# Allegro board visualscope1.0.brd
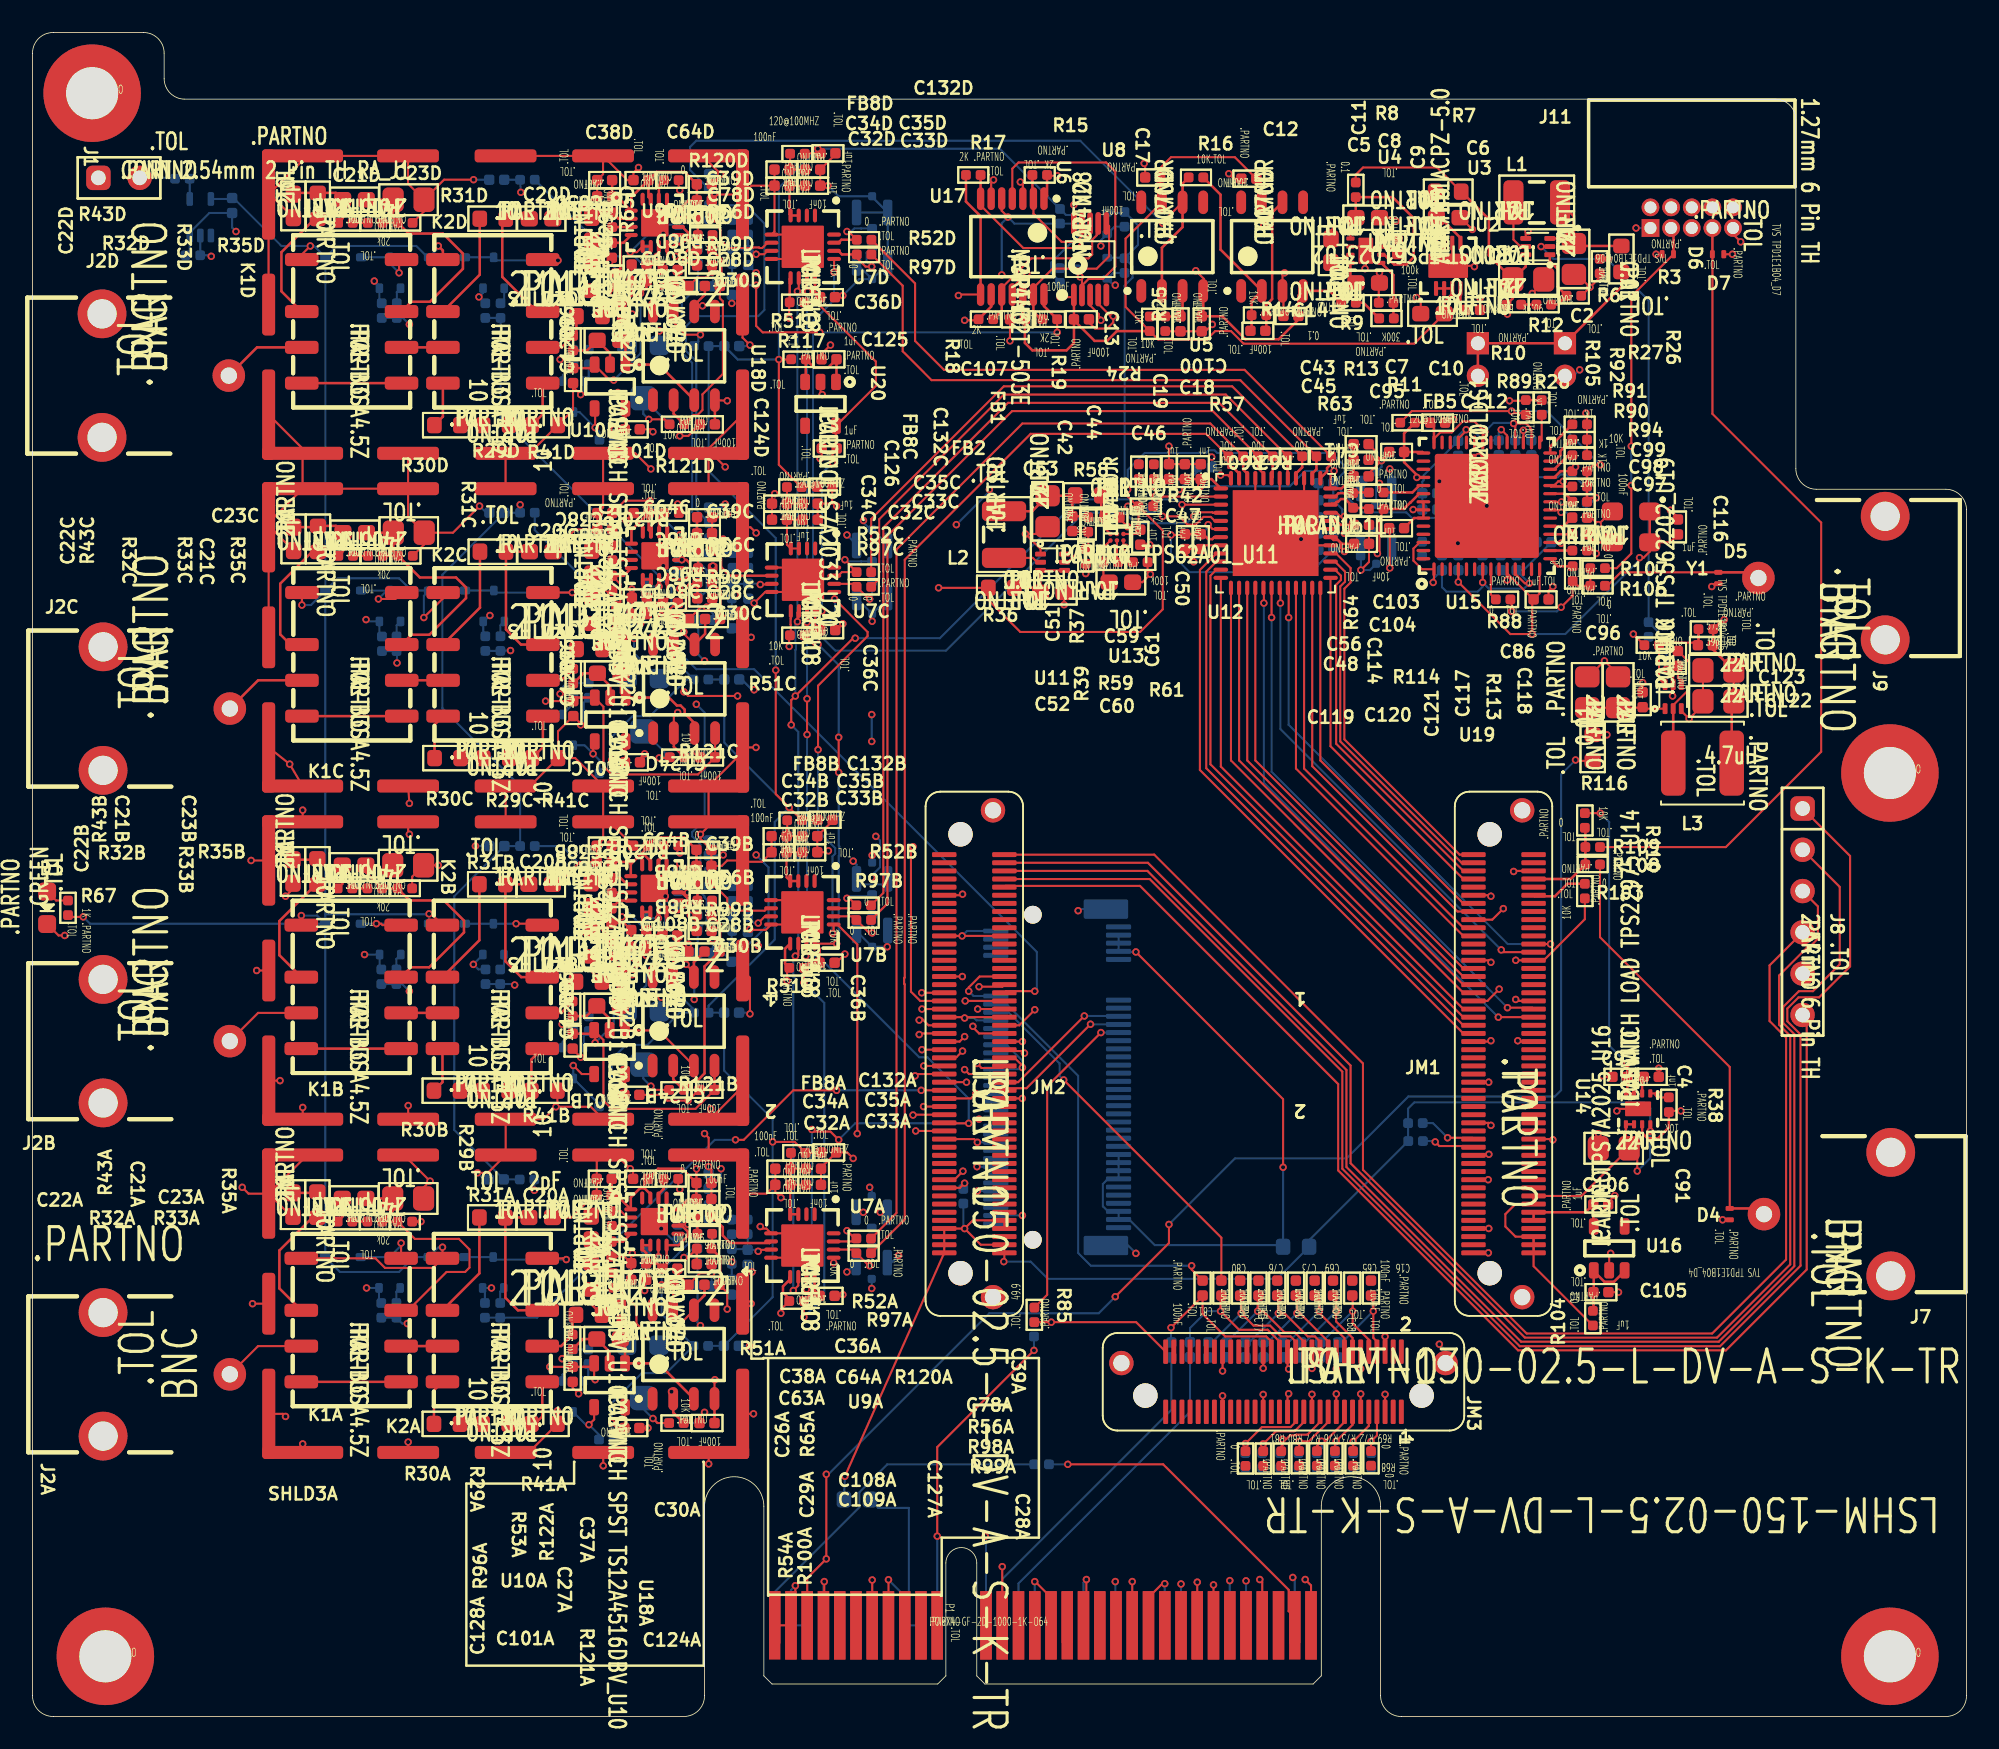
[diagram p0: board, top side]
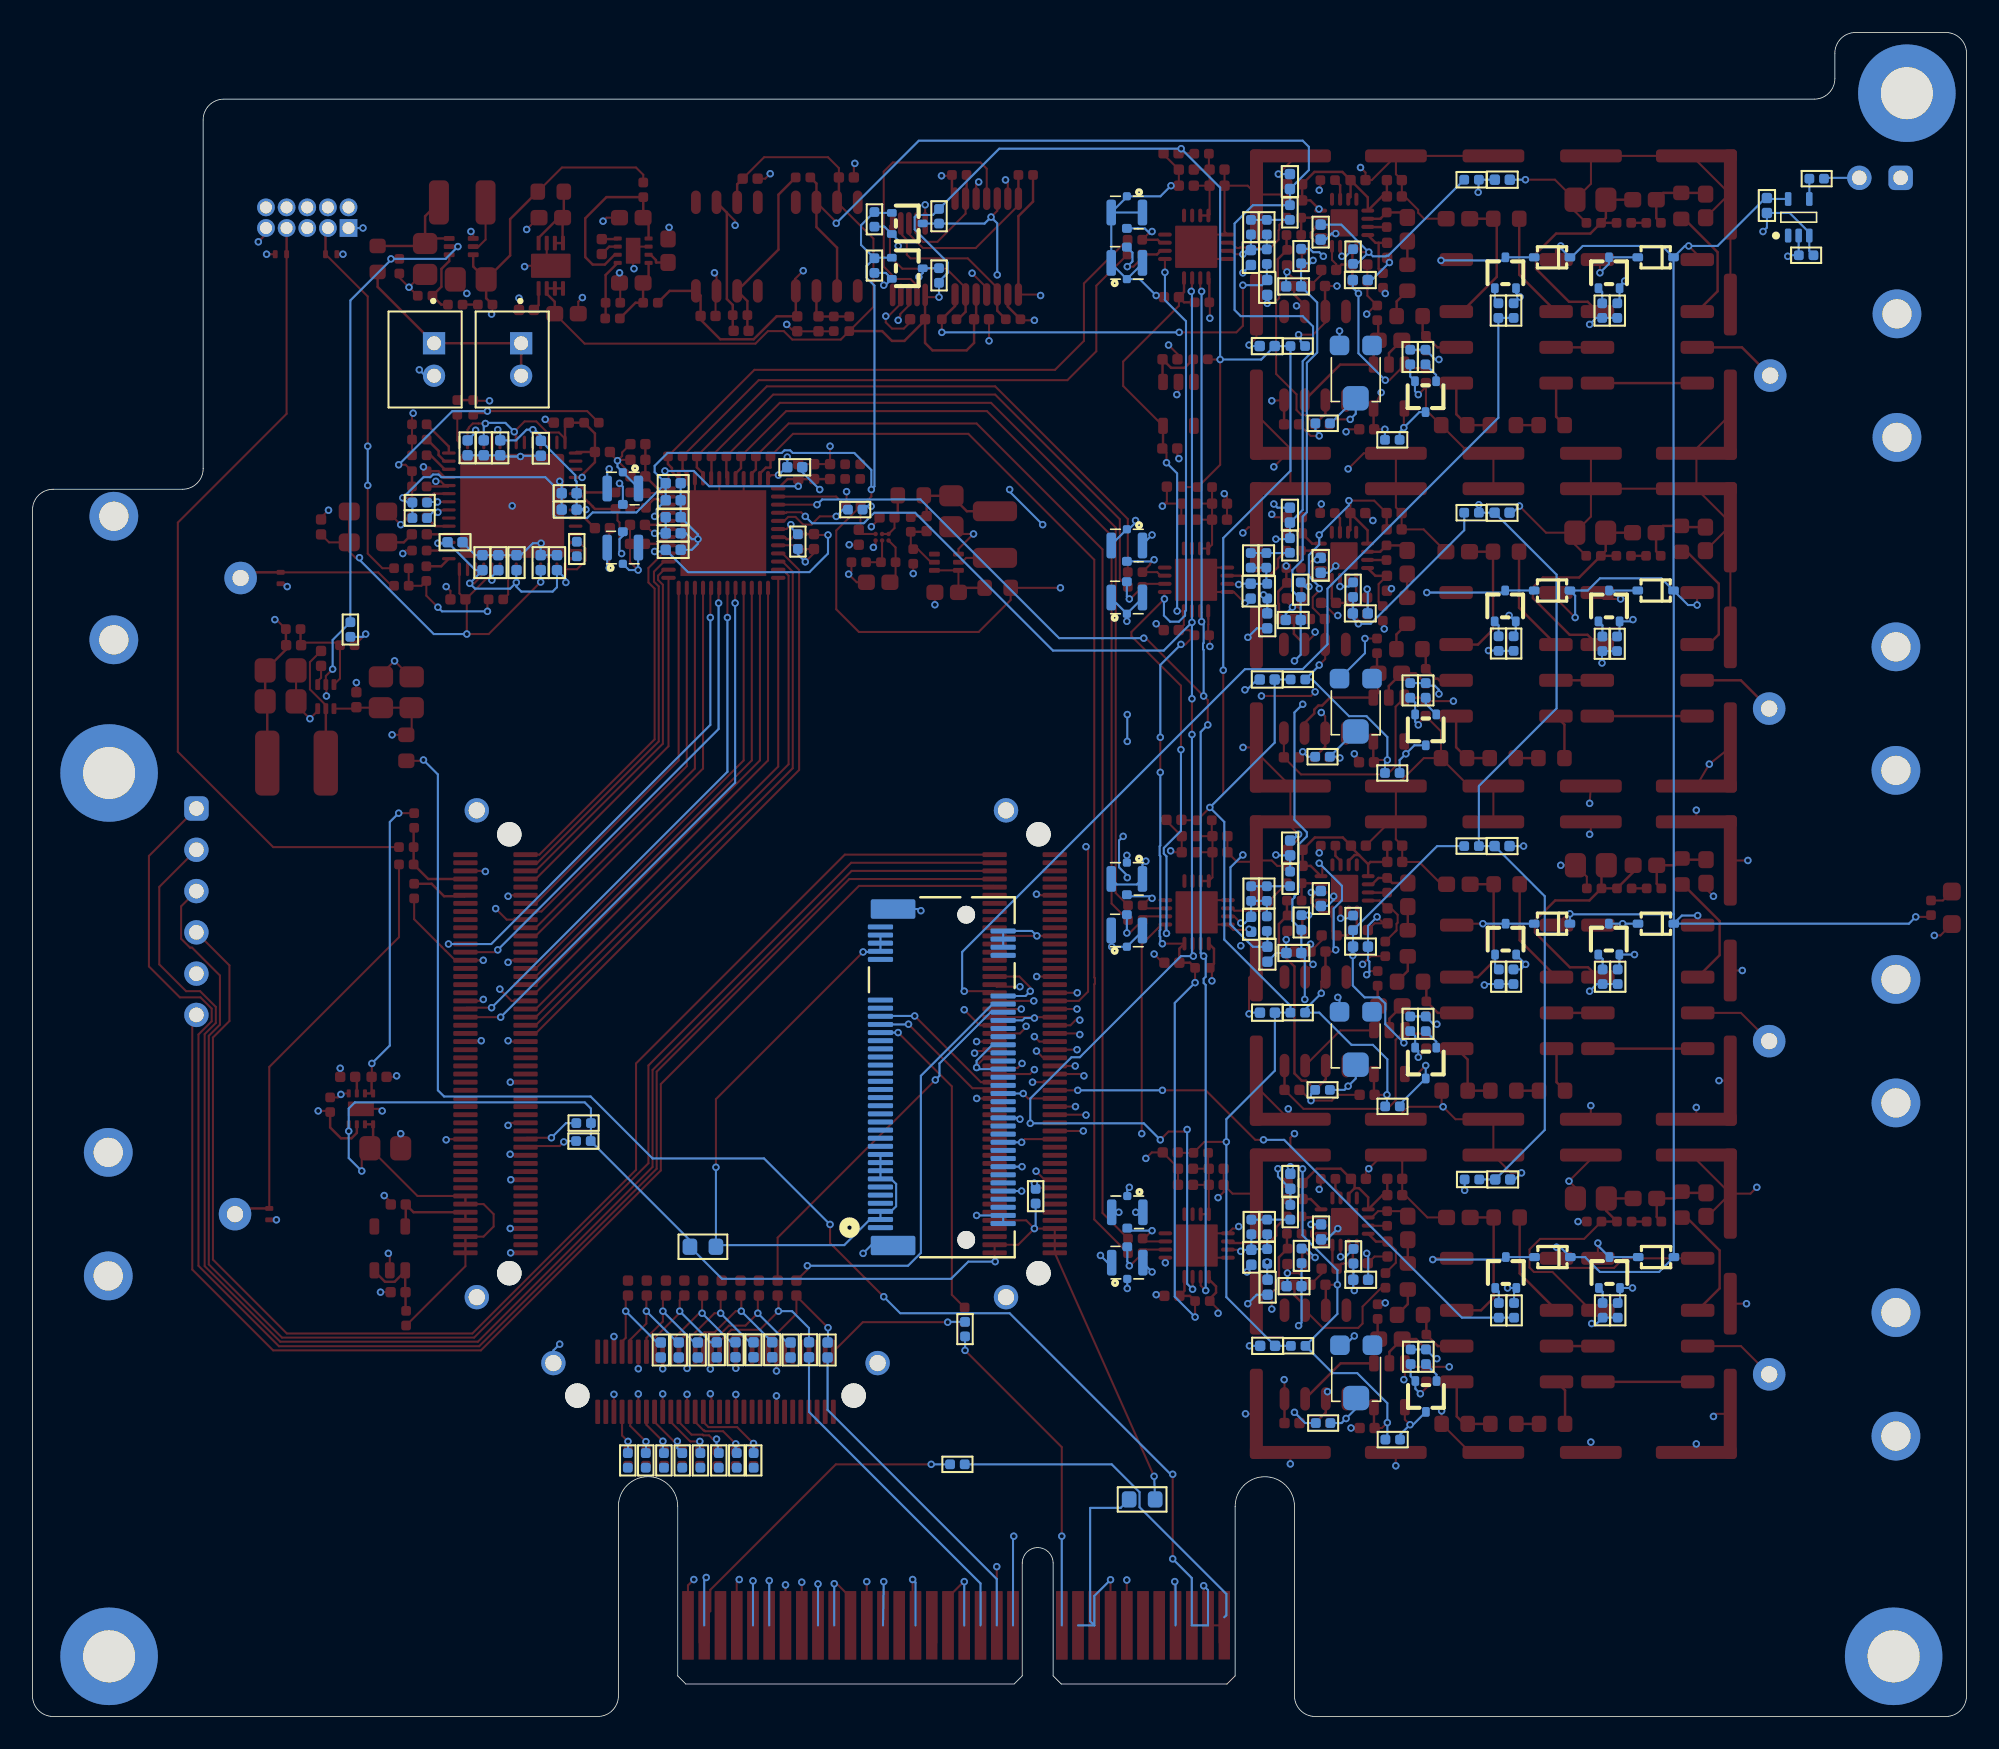
[diagram p1: board, bottom side, seen from below]

Outline 119 x 103.6 mm; copper layers: TOP, GND2, PWR3, PWR4, GND5, BOTTOM. Coordinates in mm from the lower left corner of the outline.
Outline path: 0,102.33 arc(0.37,103.23) 1.27,103.6 6.83,103.6 arc(7.73,103.23) 8.1,102.33 8.1,100.77 arc(8.47,99.87) 9.37,99.5 107.23,99.5 arc(108.13,99.13) 108.5,98.23 108.5,76.77 arc(108.87,75.87) 109.77,75.5 117.73,75.5 arc(118.63,75.13) 119,74.23 119,1.27 arc(118.63,0.37) 117.73,0 84.22,0 arc(83.32,0.37) 82.95,1.27 82.95,12.93 arc(81.14,14.75) 79.3,12.96 79.3,2.5 78.8,2 58.6,2 58.1,2.5 58.1,9.45 arc(57.15,10.4) 56.2,9.45 56.2,2.5 55.7,2 45.5,2 45,2.5 45,12.93 arc(43.17,14.75) 41.35,12.93 41.35,1.27 arc(40.98,0.37) 40.08,0 1.27,0 arc(0.37,0.37) 0,1.27 0,102.33

## Design rules (mm)
constraint set DEFAULT: min track width 0.127

## Placement (name value [footprint] x y rotation side)
C1  100nF  [GEN_C_0402]  12.28 92.96 270 bottom
C2  22uF  [GEN_C_0805]  94.84 89.67 90 top
C3  22uF  [GEN_C_0805]  92.04 88.41 180 top
C4  1nF  [GEN_C_0402]  99.61 39.35 180 top
C5  10uF  [GEN_C_0603]  82.16 88.19 180 top
C6  10uF  [GEN_C_0603]  87.11 92.21 180 top
C7  10uF  [GEN_C_0603]  86.14 86.3 0 top
C8  10uF  [GEN_C_0603]  82.16 92.21 180 top
C9  1uF  [GEN_C_0402]  83.97 90.43 90 top
C10  10nF  [GEN_C_0402]  88.61 86.53 180 top
C11  10uF  [GEN_C_0603]  79.9 90.18 270 top
C12  100nF  [GEN_C_0402]  74.84 94.61 180 top
C13  100nF  [GEN_C_0402]  64.54 85.96 180 top
C14  100nF  [GEN_C_0402]  77.43 86.16 0 top
C15  100nF  [GEN_C_0402]  79.24 22.55 90 bottom
C16  100nF  [GEN_C_0402]  82.36 26.36 270 top
C17  100nF  [GEN_C_0402]  68.92 94.68 180 top
C18  100nF  [GEN_C_0402]  71.95 85.68 90 top
C19  100nF  [GEN_C_0402]  70.64 85.68 90 top
C20A  2pF  [GEN_C_0603]  31.27 30.7 0 top
C20B  2pF  [GEN_C_0603]  31.27 51.2 0 top
C20C  2pF  [GEN_C_0603]  31.31 71.66 0 top
C20D  2pF  [GEN_C_0603]  31.29 92.14 0 top
C21A  5.1pF  [GEN_C_0603]  19.79 31.87 180 top
C21B  5.1pF  [GEN_C_0603]  19.79 52.37 180 top
C21C  5.1pF  [GEN_C_0603]  19.82 72.83 180 top
C21D  5.1pF  [GEN_C_0603]  19.81 93.31 180 top
C22A  2pF  [GEN_C_0603]  16.03 31.49 90 top
C22B  2pF  [GEN_C_0603]  16.03 51.99 90 top
C22C  2pF  [GEN_C_0603]  16.07 72.45 90 top
C22D  2pF  [GEN_C_0603]  16.05 92.93 90 top
C23A  240pF  [GEN_C_0805]  23.11 31.87 180 top
C23B  240pF  [GEN_C_0805]  23.11 52.37 180 top
C23C  240pF  [GEN_C_0805]  23.15 72.83 180 top
C23D  240pF  [GEN_C_0805]  23.14 93.31 180 top
C26A  22nF  [GEN_C_0603]  34.38 30.05 270 top
C26B  22nF  [GEN_C_0603]  34.38 50.55 270 top
C26C  22nF  [GEN_C_0603]  34.42 71.01 270 top
C26D  22nF  [GEN_C_0603]  34.4 91.5 270 top
C27A  22nF  [GEN_C_0603]  35.45 23.22 0 top
C27B  22nF  [GEN_C_0603]  35.45 43.72 0 top
C27C  22nF  [GEN_C_0603]  35.48 64.18 0 top
C27D  22nF  [GEN_C_0603]  35.47 84.66 0 top
C28A  100nF  [GEN_C_0402]  41.33 27.83 0 top
C28B  100nF  [GEN_C_0402]  41.33 48.33 0 top
C28C  100nF  [GEN_C_0402]  41.36 68.79 0 top
C28D  100nF  [GEN_C_0402]  41.35 89.27 0 top
C29A  100pF  [GEN_C_0402]  35.62 28.76 90 top
C29B  100pF  [GEN_C_0402]  35.62 49.26 90 top
C29C  100pF  [GEN_C_0402]  35.66 69.72 90 top
C29D  100pF  [GEN_C_0402]  35.65 90.2 90 top
C30A  100pF  [GEN_C_0402]  41.81 26.56 0 top
C30B  100pF  [GEN_C_0402]  41.81 47.06 0 top
C30C  100pF  [GEN_C_0402]  41.85 67.52 0 top
C30D  100pF  [GEN_C_0402]  41.83 88 0 top
C31A  100nF  [GEN_C_0402]  44.01 28.25 270 bottom
C31B  100nF  [GEN_C_0402]  44.02 48.74 270 bottom
C31C  100nF  [GEN_C_0402]  44.04 69.23 270 bottom
C31D  100nF  [GEN_C_0402]  44.03 89.76 270 bottom
C32A  1nF  [GEN_C_0402]  46.16 32.71 0 top
C32B  1nF  [GEN_C_0402]  45.94 53.17 0 top
C32C  1nF  [GEN_C_0402]  45.96 73.63 0 top
C32D  1nF  [GEN_C_0402]  46.11 94.18 0 top
C33A  10nF  [GEN_C_0402]  48.06 32.71 180 top
C33B  10nF  [GEN_C_0402]  47.83 53.17 180 top
C33C  10nF  [GEN_C_0402]  47.85 73.63 180 top
C33D  10nF  [GEN_C_0402]  48.01 94.18 180 top
C34A  100nF  [GEN_C_0402]  46.16 33.7 0 top
C34B  100nF  [GEN_C_0402]  45.94 54.16 0 top
C34C  100nF  [GEN_C_0402]  45.96 74.62 0 top
C34D  100nF  [GEN_C_0402]  46.11 95.17 0 top
C35A  1uF  [GEN_C_0402]  48.06 33.7 180 top
C35B  1uF  [GEN_C_0402]  47.83 54.16 180 top
C35C  1uF  [GEN_C_0402]  47.85 74.62 180 top
C35D  1uF  [GEN_C_0402]  48.01 95.17 180 top
C36A  100nF  [GEN_C_0402]  48.89 25.88 180 top
C36B  100nF  [GEN_C_0402]  48.89 46.37 180 top
C36C  100nF  [GEN_C_0402]  48.93 66.83 180 top
C36D  100nF  [GEN_C_0402]  48.92 87.32 180 top
C37A  100nF  [GEN_C_0402]  39.9 26.56 180 top
C37B  100nF  [GEN_C_0402]  39.9 47.06 180 top
C37C  100nF  [GEN_C_0402]  39.94 67.52 180 top
C37D  100nF  [GEN_C_0402]  39.93 88 180 top
C38A  2.2uF  [GEN_C_0402]  35.18 33.08 180 top
C38B  2.2uF  [GEN_C_0402]  35.18 53.57 180 top
C38C  2.2uF  [GEN_C_0402]  35.22 74.03 180 top
C38D  2.2uF  [GEN_C_0402]  35.2 94.52 180 top
C39A  100nF  [GEN_C_0402]  41.31 32.82 0 top
C39B  100nF  [GEN_C_0402]  41.31 53.32 0 top
C39C  100nF  [GEN_C_0402]  41.35 73.78 0 top
C39D  100nF  [GEN_C_0402]  41.34 94.27 0 top
C40  100nF  [GEN_C_0402]  71.22 22.56 90 bottom
C41  1uF  [GEN_C_0402]  81.75 78.28 180 top
C42  1uF  [GEN_C_0402]  69.93 76.59 270 top
C43  10nF  [GEN_C_0402]  81.75 77.31 180 top
C44  10nF  [GEN_C_0402]  70.9 76.59 270 top
C45  1nF  [GEN_C_0402]  81.75 76.29 180 top
C46  1nF  [GEN_C_0402]  71.88 76.59 270 top
C47  10nF  [GEN_C_0402]  71.88 72.28 90 top
C48  10nF  [GEN_C_0402]  81.78 72.14 180 top
C49  1uF  [GEN_C_0402]  79.58 71.77 0 bottom
C50  1uF  [GEN_C_0402]  70.92 72.28 90 top
C51  39pF  [GEN_C_0402]  63.98 73.39 90 top
C52  10uF  [GEN_C_0603]  62.75 69.16 180 top
C53  22uF  [GEN_C_0805]  62.46 74.15 90 top
C54  1uF  [GEN_C_0402]  79.58 73.78 0 bottom
C55  10nF  [GEN_C_0402]  79.58 72.79 0 bottom
C56  1nF  [GEN_C_0402]  81.78 73.31 180 top
C57  10nF  [GEN_C_0402]  79.58 74.82 0 bottom
C58  1uF  [GEN_C_0402]  79.58 75.88 0 bottom
C59  100nF  [GEN_C_0402]  66.42 73.77 180 top
C60  10uF  [GEN_C_0603]  66.97 69.78 180 top
C61  2.2uF  [GEN_C_0402]  68.16 72.55 90 top
C62  100nF  [GEN_C_0402]  80.34 22.55 90 bottom
C63A  100nF  [GEN_C_0402]  35.18 32.07 180 top
C63B  100nF  [GEN_C_0402]  35.18 52.57 180 top
C63C  100nF  [GEN_C_0402]  35.22 73.03 180 top
C63D  100nF  [GEN_C_0402]  35.2 93.52 180 top
C64A  100nF  [GEN_C_0402]  37.41 33.08 0 top
C64B  100nF  [GEN_C_0402]  37.41 53.57 0 top
C64C  100nF  [GEN_C_0402]  37.45 74.03 0 top
C64D  100nF  [GEN_C_0402]  37.44 94.52 0 top
C65  100nF  [GEN_C_0402]  81.2 26.36 270 top
C66  100nF  [GEN_C_0402]  78.07 22.55 90 bottom
C67  100nF  [GEN_C_0402]  76.9 22.56 90 bottom
C68  100nF  [GEN_C_0402]  80.02 26.36 270 top
C69  100nF  [GEN_C_0402]  78.89 26.36 270 top
C70  100nF  [GEN_C_0402]  75.74 22.56 90 bottom
C71  100nF  [GEN_C_0402]  74.64 22.56 90 bottom
C72  100nF  [GEN_C_0402]  77.74 26.36 270 top
C73  100nF  [GEN_C_0402]  76.59 26.36 270 top
C74  100nF  [GEN_C_0402]  73.48 22.56 90 bottom
C75  100nF  [GEN_C_0402]  72.35 22.55 90 bottom
C76  100nF  [GEN_C_0402]  75.44 26.36 270 top
C77  100nF  [GEN_C_0402]  74.31 26.36 270 top
C78A  100nF  [GEN_C_0402]  41.31 31.83 180 top
C78B  100nF  [GEN_C_0402]  41.31 52.33 180 top
C78C  100nF  [GEN_C_0402]  41.35 72.79 180 top
C78D  100nF  [GEN_C_0402]  41.34 93.27 180 top
C79  100nF  [GEN_C_0402]  70.08 22.55 90 bottom
C80  100nF  [GEN_C_0402]  73.15 26.36 270 top
C81  100nF  [GEN_C_0402]  72 26.36 270 top
C82  1uF  [GEN_C_0402]  85.98 75.25 0 bottom
C83  1uF  [GEN_C_0402]  87.72 78.02 270 bottom
C84  1uF  [GEN_C_0402]  90.22 78.05 270 bottom
C85  1uF  [GEN_C_0402]  92.23 78.05 270 bottom
C86  1uF  [GEN_C_0402]  92.82 68.73 0 top
C87  1uF  [GEN_C_0402]  90.33 70.99 90 bottom
C88  1uF  [GEN_C_0402]  91.23 78.05 270 bottom
C89  1uF  [GEN_C_0402]  87.73 70.99 90 bottom
C90  1uF  [GEN_C_0402]  86.73 70.99 90 bottom
C91  22uF  [GEN_C_0805]  97.29 34.96 0 top
C92  1uF  [GEN_C_0402]  97.68 39.35 0 top
C93  1uF  [GEN_C_0402]  91.31 70.99 90 bottom
C94  1uF  [GEN_C_0402]  93 72.24 180 bottom
C95  1uF  [GEN_C_0402]  83.93 77.79 180 top
C96  0  [GEN_R_0402]  94.77 70.31 270 top
C97  0  [GEN_R_0402]  95.2 71.73 0 top
C98  100nF  [GEN_C_0402]  95.2 72.73 0 top
C99  100nF  [GEN_C_0402]  95.2 73.75 0 top
C100  100nF  [GEN_C_0402]  75.4 85.25 180 top
C101A  100nF  [GEN_C_0402]  36.88 17.75 180 top
C101B  100nF  [GEN_C_0402]  36.88 38.25 180 top
C101C  100nF  [GEN_C_0402]  36.92 58.71 180 top
C101D  100nF  [GEN_C_0402]  36.91 79.19 180 top
C102A  2.2uF  [GEN_C_0402]  37.27 26.87 0 bottom
C102B  2.2uF  [GEN_C_0402]  37.29 47.36 0 bottom
C102C  2.2uF  [GEN_C_0402]  37.3 67.86 0 bottom
C102D  2.2uF  [GEN_C_0402]  37.3 88.37 0 bottom
C103  0  [GEN_R_0402]  82.68 75.3 0 top
C104  0  [GEN_R_0402]  82.68 74.29 0 top
C105  1uF  [GEN_C_0402]  96.51 26.1 180 top
C106  1uF  [GEN_C_0402]  96.49 31.5 180 top
C107  100nF  [GEN_C_0402]  60.6 85.96 0 top
C108A  100nF  [GEN_C_0402]  37.3 27.88 0 top
C108B  100nF  [GEN_C_0402]  37.3 48.38 0 top
C108C  100nF  [GEN_C_0402]  37.34 68.84 0 top
C108D  100nF  [GEN_C_0402]  37.33 89.32 0 top
C109A  100nF  [GEN_C_0402]  37.3 26.87 180 top
C109B  100nF  [GEN_C_0402]  37.3 47.36 180 top
C109C  100nF  [GEN_C_0402]  37.34 67.82 180 top
C109D  100nF  [GEN_C_0402]  37.33 88.31 180 top
C110A  100nF  [GEN_C_0402]  39.71 29.81 270 bottom
C110B  100nF  [GEN_C_0402]  39.73 50.32 270 bottom
C110C  100nF  [GEN_C_0402]  39.74 70.82 270 bottom
C110D  100nF  [GEN_C_0402]  39.74 91.32 270 bottom
C111A  2.2uF  [GEN_C_0402]  43 22.8 180 bottom
C111B  2.2uF  [GEN_C_0402]  43.01 43.3 180 bottom
C111C  2.2uF  [GEN_C_0402]  43.03 63.8 180 bottom
C111D  2.2uF  [GEN_C_0402]  43.03 84.31 180 bottom
C112  1uF  [GEN_C_0402]  86.46 79.6 0 top
C113  1uF  [GEN_C_0402]  89.22 70.99 90 bottom
C114  1uF  [GEN_C_0402]  83.93 73.11 180 top
C115  1uF  [GEN_C_0402]  85.98 74.25 0 bottom
C116  1uF  [GEN_C_0402]  101.24 73.18 90 top
C117  100nF  [GEN_C_0402]  101.24 65.09 270 top
C118  39pF  [GEN_C_0402]  102.93 65.91 0 top
C119  22uF  [GEN_C_0805]  95.67 63.01 270 top
C120  22uF  [GEN_C_0805]  97.56 63.01 270 top
C121  100nF  [GEN_C_0402]  99.07 62.55 90 top
C122  22uF  [GEN_C_0805]  103.73 62.45 0 top
C123  22uF  [GEN_C_0805]  103.73 64.36 0 top
C124A  100nF  [GEN_C_0402]  41.5 18.05 180 top
C124B  100nF  [GEN_C_0402]  41.5 38.55 180 top
C124C  100nF  [GEN_C_0402]  41.54 59.01 180 top
C124D  100nF  [GEN_C_0402]  41.53 79.5 180 top
C125  1uF  [GEN_C_0402]  49.01 83.5 0 top
C126  1uF  [GEN_C_0402]  49.02 78.01 0 top
C127A  100nF  [GEN_C_0402]  39.22 27.55 180 top
C127B  100nF  [GEN_C_0402]  39.22 48.05 180 top
C127C  100nF  [GEN_C_0402]  39.26 68.51 180 top
C127D  100nF  [GEN_C_0402]  39.24 88.99 180 top
C128A  100nF  [GEN_C_0402]  33.24 21.05 90 top
C128B  100nF  [GEN_C_0402]  33.24 41.55 90 top
C128C  100nF  [GEN_C_0402]  33.27 62.01 90 top
C128D  100nF  [GEN_C_0402]  33.26 82.49 90 top
C129A  100nF  [GEN_C_0402]  41.38 26.47 0 bottom
C129B  100nF  [GEN_C_0402]  41.39 46.97 0 bottom
C129C  100nF  [GEN_C_0402]  41.43 67.46 0 bottom
C129D  100nF  [GEN_C_0402]  41.4 87.98 0 bottom
C130A  100nF  [GEN_C_0402]  41.6 32.92 90 bottom
C130B  100nF  [GEN_C_0402]  41.62 53.43 90 bottom
C130C  100nF  [GEN_C_0402]  41.63 73.91 90 bottom
C130D  100nF  [GEN_C_0402]  41.63 94.43 90 bottom
C131A  100nF  [GEN_C_0402]  43 26.41 270 bottom
C131B  100nF  [GEN_C_0402]  43.01 46.89 270 bottom
C131C  100nF  [GEN_C_0402]  43.03 67.4 270 bottom
C131D  100nF  [GEN_C_0402]  43.03 87.92 270 bottom
C132A  1uF  [GEN_C_0402]  49 34.7 180 top
C132B  1uF  [GEN_C_0402]  48.77 55.16 180 top
C132C  1uF  [GEN_C_0402]  48.74 75.66 180 top
C132D  1uF  [GEN_C_0402]  48.95 96.17 180 top
C133A  2.2uF  [GEN_C_0402]  28.54 33.04 180 bottom
C133B  2.2uF  [GEN_C_0402]  28.57 53.55 180 bottom
C133C  2.2uF  [GEN_C_0402]  28.57 74.06 180 bottom
C133D  2.2uF  [GEN_C_0402]  28.56 94.54 180 bottom
C134  100nF  [GEN_C_0402]  72.1 76.85 0 bottom
D1  GREEN  [LED_0603_LTST-S270K]  0.9 49.75 90 top
D2A  1N4148  [GEN_SOD_323]  19.1 28.26 0 bottom
D2B  1N4148  [GEN_SOD_323]  19.11 48.77 0 bottom
D2C  1N4148  [GEN_SOD_323]  19.13 69.27 0 bottom
D2D  1N4148  [GEN_SOD_323]  19.13 89.77 0 bottom
D3A  1N4148  [GEN_SOD_323]  25.48 28.26 0 bottom
D3B  1N4148  [GEN_SOD_323]  25.5 48.77 0 bottom
D3C  1N4148  [GEN_SOD_323]  25.5 69.27 0 bottom
D3D  1N4148  [GEN_SOD_323]  25.5 89.77 0 bottom
D4  TVS TPD1E1B04_D4  [TI_X1SON_DPY0002A]  104.43 30.9 270 top
D5  TVS TPD1E1B04_D5  [TI_X1SON_DPY0002A]  103.73 70.04 270 top
D6  TVS TPD1E1B04_D6  [TI_X1SON_DPY0002A]  100.62 89.96 180 top
D7  TVS TPD1E1B04_D7  [TI_X1SON_DPY0002A]  103.72 89.96 0 top
FB1  120@100MHZ  [GEN_R_0402]  69 76.59 270 top
FB2  120@100MHZ  [GEN_R_0402]  68.07 76.59 270 top
FB3  120@100MHZ  [GEN_R_0402]  85.51 71.82 90 bottom
FB4A  0  [GEN_R_0402]  40.92 28.34 270 bottom
FB4B  0  [GEN_R_0402]  40.93 48.85 270 bottom
FB4C  0  [GEN_R_0402]  40.97 69.32 270 bottom
FB4D  0  [GEN_R_0402]  40.94 89.85 270 bottom
FB5  120@100MHZ  [GEN_R_0402]  84.61 79.6 0 top
FB6A  0  [GEN_R_0402]  41.6 31.02 270 bottom
FB6B  0  [GEN_R_0402]  41.62 51.53 270 bottom
FB6C  0  [GEN_R_0402]  41.63 72.04 270 bottom
FB6D  0  [GEN_R_0402]  41.63 92.53 270 bottom
FB7A  120@100MHZ  [GEN_R_0402]  43.03 28.3 90 bottom
FB7B  120@100MHZ  [GEN_R_0402]  43.05 48.77 90 bottom
FB7C  120@100MHZ  [GEN_R_0402]  43.03 69.23 90 bottom
FB7D  120@100MHZ  [GEN_R_0402]  43.05 89.81 90 bottom
FB8A  120@100MHZ  [GEN_R_0402]  47.12 34.68 0 top
FB8B  120@100MHZ  [GEN_R_0402]  46.89 55.14 0 top
FB8C  120@100MHZ  [GEN_R_0402]  46.87 75.63 0 top
FB8D  120@100MHZ  [GEN_R_0402]  47.07 96.14 0 top
FB9A  120@100MHZ  [GEN_R_0402]  41.12 22.8 180 bottom
FB9B  120@100MHZ  [GEN_R_0402]  41.15 43.3 180 bottom
FB9C  120@100MHZ  [GEN_R_0402]  41.14 63.8 180 bottom
FB9D  120@100MHZ  [GEN_R_0402]  41.15 84.31 180 bottom
FB10A  120@100MHZ  [GEN_R_0402]  30.43 33.04 0 bottom
FB10B  120@100MHZ  [GEN_R_0402]  30.45 53.55 0 bottom
FB10C  120@100MHZ  [GEN_R_0402]  30.45 74.06 0 bottom
FB10D  120@100MHZ  [GEN_R_0402]  30.45 94.54 0 bottom
J1  CONN 2.54mm 2 Pin TH RA_J1  [GEN_2_54MM_1X2_PIN_TH_RA]  5.32 94.66 0 top
J2A  BNC  [MOL_0731000105]  8.24 21.05 90 top
J2B  BNC  [MOL_0731000105]  8.24 41.55 90 top
J2C  BNC  [MOL_0731000105]  8.24 62.01 90 top
J2D  BNC  [MOL_0731000105]  8.18 82.49 90 top
J3A  UFL  [TE_2334884-1]  51.64 27.92 0 bottom
J3B  UFL  [TE_2334884-1]  51.66 48.35 0 bottom
J3C  UFL  [TE_2334884-1]  51.66 68.84 0 bottom
J3D  UFL  [TE_2334884-1]  51.66 89.43 0 bottom
J4A  UFL  [TE_2334884-1]  51.64 31.02 180 bottom
J4B  UFL  [TE_2334884-1]  51.66 51.53 180 bottom
J4C  UFL  [TE_2334884-1]  51.66 72.04 180 bottom
J4D  UFL  [TE_2334884-1]  51.66 92.53 180 bottom
J5  UFL  [TE_2334884-1]  82.68 71.91 0 bottom
J6  UFL  [TE_2334884-1]  82.68 75.55 180 bottom
J7  BNC  [MOL_0731000105]  110.44 30.9 270 top
J8  2.54mm 6 Pin TH  [GEN_2_54MM_6_PIN_TH_RA]  108.91 49.51 270 top
J9  BNC  [MOL_0731000105]  110.1 70.04 270 top
J10  CONN M.2 Key M FEMALE  [TE_M2_KEYM_2199230]  63.05 39.33 90 bottom
J11  1.27mm 6 Pin TH  [GEN_1_27MM_2X5_PIN_TH_RA]  102.1 92.21 0 top
J12  B2B-PH-K-S(LF)(SN)  [JST_B2B-PH-K-S_LF_SN]  89.48 83.48 90 bottom
J13  B2B-PH-K-S(LF)(SN)  [JST_B2B-PH-K-S_LF_SN]  94.84 83.48 90 bottom
JM1  LSHM-150-02.5-L-DV-A-S-K-TR  [SAM_LSHM-150-XX_X-XX-DV-A-S]  90.51 40.77 270 top
JM2  LSHM-150-02.5-L-DV-A-S-K-TR  [SAM_LSHM-150-XX_X-XX-DV-A-S]  57.95 40.77 270 top
JM3  LSHM-130-02.5-L-DV-A-S-K-TR  [SAM_LSHM-130-XX_X-XX-DV-A-S]  76.97 20.59 0 top
K1A  FTR-B3SA4.5Z  [FUJ_FTR-B3SA]  19.61 24.39 270 top
K1B  FTR-B3SA4.5Z  [FUJ_FTR-B3SA]  19.61 44.89 270 top
K1C  FTR-B3SA4.5Z  [FUJ_FTR-B3SA]  19.65 65.35 270 top
K1D  FTR-B3SA4.5Z  [FUJ_FTR-B3SA]  19.64 85.83 270 top
K2A  FTR-B3SA4.5Z  [FUJ_FTR-B3SA]  28.3 24.39 270 top
K2B  FTR-B3SA4.5Z  [FUJ_FTR-B3SA]  28.3 44.89 270 top
K2C  FTR-B3SA4.5Z  [FUJ_FTR-B3SA]  28.33 65.35 270 top
K2D  FTR-B3SA4.5Z  [FUJ_FTR-B3SA]  28.32 85.83 270 top
L1  1uH  [GEN_L_1210]  92.56 93.15 180 top
L2  1uH  [GEN_L_1210]  59.78 72.71 90 top
L3  4.7uH  [TY_IND_NRS5030]  102.76 58.65 0 top
MH1  M3  [MH_M3]  114.29 58.04 0 top
MH2  M3  [MH_M3]  4.48 3.7 0 top
MH3  M3  [MH_M3]  114.29 3.7 0 top
MH4  M3  [MH_M3]  3.67 99.87 0 top
P1  PCIeX4-GF-2D-1000-1K-O64  [PCIEX4-GF-2D-1000-1K-O64]  55.17 5.61 0 top
Q1  DMN62D0UW  [GEN_SOT_323]  65.18 91.85 270 bottom
Q2  DMN62D0UW  [GEN_SOT_323]  65.18 89.1 270 bottom
Q3A  DMN62D0UW  [GEN_SOT_323]  21.97 27.31 180 bottom
Q3B  DMN62D0UW  [GEN_SOT_323]  22.01 47.82 180 bottom
Q3C  DMN62D0UW  [GEN_SOT_323]  22 68.32 180 bottom
Q3D  DMN62D0UW  [GEN_SOT_323]  22 88.82 180 bottom
Q4A  DMN62D0UW  [GEN_SOT_323]  28.35 27.31 180 bottom
Q4B  DMN62D0UW  [GEN_SOT_323]  28.36 47.82 180 bottom
Q4C  DMN62D0UW  [GEN_SOT_323]  28.38 68.32 180 bottom
Q4D  DMN62D0UW  [GEN_SOT_323]  28.37 88.82 180 bottom
Q5A  DMN62D0UW  [GEN_SOT_323]  33.26 19.69 0 bottom
Q5B  DMN62D0UW  [GEN_SOT_323]  33.27 40.2 0 bottom
Q5C  DMN62D0UW  [GEN_SOT_323]  33.27 60.7 0 bottom
Q5D  DMN62D0UW  [GEN_SOT_323]  33.29 81.2 0 bottom
R1  0  [GEN_R_0402]  9.22 94.61 0 bottom
R2  10K  [GEN_R_0402]  9.87 89.9 0 bottom
R3  0.01  [GEN_R_0603]  97.76 89.67 270 top
R6  10K  [GEN_R_0402]  96.43 89.22 270 top
R7  0.01  [GEN_R_0603]  87.11 93.81 180 top
R8  0.1  [GEN_R_0402]  81.42 93.92 270 top
R9  0.1  [GEN_R_0402]  80.97 86.98 180 top
R10  680K  [GEN_R_0402]  91.15 86.86 180 top
R11  300K  [GEN_R_0402]  83.31 86.01 180 top
R12  90.9k  [GEN_R_0402]  92.99 86.86 180 top
R13  100k  [GEN_R_0402]  83.29 86.98 0 top
R14  10K  [GEN_R_0402]  75.46 86.21 0 top
R15  2K  [GEN_R_0402]  61.98 94.84 180 top
R16  10K  [GEN_R_0402]  71.59 94.68 0 top
R17  2K  [GEN_R_0402]  57.89 94.84 0 top
R18  2K  [GEN_R_0402]  58.66 85.96 0 top
R19  2K  [GEN_R_0402]  62.6 85.96 180 top
R20  10K  [GEN_R_0402]  67.2 92.11 90 bottom
R21  10K  [GEN_R_0402]  67.2 89.26 90 bottom
R22  10K  [GEN_R_0402]  63.22 92.3 90 bottom
R23  10K  [GEN_R_0402]  63.22 88.65 270 bottom
R24  10K  [GEN_R_0402]  68.74 85.68 270 top
R25  10K  [GEN_R_0402]  69.7 85.68 90 top
R26  1K  [GEN_R_0402]  95.2 77.59 180 top
R27  1K  [GEN_R_0402]  95.2 78.56 180 top
R28  1K  [GEN_R_0402]  92.86 80.54 90 top
R29A  30  [GEN_R_0603]  28.5 18 0 top
R29B  30  [GEN_R_0603]  28.5 38.5 0 top
R29C  30  [GEN_R_0603]  28.54 58.96 0 top
R29D  30  [GEN_R_0603]  28.52 79.44 0 top
R30A  10  [GEN_R_0603]  25.5 18 0 top
R30B  10  [GEN_R_0603]  25.5 38.5 0 top
R30C  10  [GEN_R_0603]  25.54 58.96 0 top
R30D  10  [GEN_R_0603]  25.53 79.44 0 top
R31A  10  [GEN_R_0603]  28.3 30.7 0 top
R31B  10  [GEN_R_0603]  28.3 51.2 0 top
R31C  10  [GEN_R_0603]  28.33 71.66 0 top
R31D  10  [GEN_R_0603]  28.32 92.14 0 top
R32A  300K  [GEN_R_0402]  19.23 30.45 0 top
R32B  300K  [GEN_R_0402]  19.23 50.95 0 top
R32C  300K  [GEN_R_0402]  19.27 71.41 0 top
R32D  300K  [GEN_R_0402]  19.25 91.89 0 top
R33A  680K  [GEN_R_0402]  21.06 30.45 0 top
R33B  680K  [GEN_R_0402]  21.06 50.95 0 top
R33C  680K  [GEN_R_0402]  21.09 71.41 0 top
R33D  680K  [GEN_R_0402]  21.08 91.89 0 top
R35A  20k  [GEN_R_0402]  22.91 30.45 180 top
R35B  20k  [GEN_R_0402]  22.91 50.95 180 top
R35C  20k  [GEN_R_0402]  22.95 71.41 180 top
R35D  20k  [GEN_R_0402]  22.94 91.89 180 top
R36  0.01  [GEN_R_0603]  59.61 69.44 0 top
R37  220K  [GEN_R_0402]  64.96 73.34 90 top
R38  10K  [GEN_R_0402]  100.69 37.64 270 top
R39  100k  [GEN_R_0402]  64.81 71.37 90 top
R41A  10  [GEN_R_0603]  31.5 18 180 top
R41B  10  [GEN_R_0603]  31.5 38.5 180 top
R41C  10  [GEN_R_0603]  31.53 58.96 180 top
R41D  10  [GEN_R_0603]  31.52 79.44 180 top
R42  10K  [GEN_R_0402]  68.5 74.45 180 top
R43A  10  [GEN_R_0603]  17.53 31.49 270 top
R43B  10  [GEN_R_0603]  17.53 51.99 270 top
R43C  10  [GEN_R_0603]  17.56 72.45 270 top
R43D  10  [GEN_R_0603]  17.55 92.93 270 top
R44  10K  [GEN_R_0402]  68.38 74.25 180 bottom
R46  10K  [GEN_R_0402]  71.91 72.28 270 bottom
R47A  10K  [GEN_R_0402]  22.39 24.99 270 bottom
R47B  10K  [GEN_R_0402]  22.39 45.51 270 bottom
R47C  10K  [GEN_R_0402]  22.4 66 270 bottom
R47D  10K  [GEN_R_0402]  22.42 86.49 270 bottom
R48A  10K  [GEN_R_0402]  28.78 24.99 270 bottom
R48B  10K  [GEN_R_0402]  28.78 45.51 270 bottom
R48C  10K  [GEN_R_0402]  28.79 66.01 270 bottom
R48D  10K  [GEN_R_0402]  28.8 86.49 270 bottom
R49A  10K  [GEN_R_0402]  21.46 24.99 270 bottom
R49B  10K  [GEN_R_0402]  21.46 45.51 270 bottom
R49C  10K  [GEN_R_0402]  21.5 66 270 bottom
R49D  10K  [GEN_R_0402]  21.49 86.49 270 bottom
R50A  10K  [GEN_R_0402]  27.84 24.99 270 bottom
R50B  10K  [GEN_R_0402]  27.88 45.51 270 bottom
R50C  10K  [GEN_R_0402]  27.86 66.01 270 bottom
R50D  10K  [GEN_R_0402]  27.86 86.49 270 bottom
R51A  10K  [GEN_R_0402]  47.02 25.56 0 top
R51B  10K  [GEN_R_0402]  47.02 46.06 0 top
R51C  10K  [GEN_R_0402]  47.05 66.52 0 top
R51D  10K  [GEN_R_0402]  47.04 87 0 top
R52A  0  [GEN_R_0402]  51.14 29.41 0 top
R52B  0  [GEN_R_0402]  51.14 49.9 0 top
R52C  0  [GEN_R_0402]  51.16 70.4 0 top
R52D  0  [GEN_R_0402]  51.17 90.85 0 top
R53A  30  [GEN_R_0603]  34.24 24.71 0 top
R53B  30  [GEN_R_0603]  34.24 45.21 0 top
R53C  30  [GEN_R_0603]  34.28 65.66 0 top
R53D  30  [GEN_R_0603]  34.26 86.15 0 top
R54A  30  [GEN_R_0603]  34.38 27.07 90 top
R54B  30  [GEN_R_0603]  34.38 47.57 90 top
R54C  30  [GEN_R_0603]  34.42 68.03 90 top
R54D  30  [GEN_R_0603]  34.4 88.51 90 top
R55A  100k  [GEN_R_0402]  37.72 28.31 270 bottom
R55B  100k  [GEN_R_0402]  37.74 48.82 270 bottom
R55C  100k  [GEN_R_0402]  37.74 69.32 270 bottom
R55D  100k  [GEN_R_0402]  37.74 89.82 270 bottom
R56A  0  [GEN_R_0402]  41.36 30.77 0 top
R56B  0  [GEN_R_0402]  41.36 51.26 0 top
R56C  0  [GEN_R_0402]  41.4 71.72 0 top
R56D  0  [GEN_R_0402]  41.39 92.21 0 top
R57  100  [GEN_R_0402]  74.04 77.53 180 top
R58  0.01  [GEN_R_0603]  64.96 75.13 0 top
R59  261K  [GEN_R_0402]  66.34 71.01 180 top
R60  100  [GEN_R_0402]  75.86 77.53 180 top
R61  100k  [GEN_R_0402]  68.16 71.01 180 top
R62  100  [GEN_R_0402]  77.67 77.53 180 top
R63  100  [GEN_R_0402]  79.45 77.53 180 top
R64  100  [GEN_R_0402]  81.25 74.81 90 top
R65A  909k  [GEN_R_0402]  35.65 30.64 90 top
R65B  909k  [GEN_R_0402]  35.65 51.14 90 top
R65C  909k  [GEN_R_0402]  35.69 71.6 90 top
R65D  909k  [GEN_R_0402]  35.67 92.08 90 top
R66  10K  [GEN_R_0402]  57.28 32.01 270 bottom
R67  1K  [GEN_R_0402]  2.18 49.75 270 top
R68  0  [GEN_R_0402]  82.36 15.88 270 top
R69  0  [GEN_R_0402]  81.25 15.88 270 top
R70  0  [GEN_R_0402]  82.37 15.75 270 bottom
R71  0  [GEN_R_0402]  81.27 15.75 270 bottom
R72  0  [GEN_R_0402]  80.14 15.88 270 top
R73  0  [GEN_R_0402]  79.03 15.88 270 top
R74  0  [GEN_R_0402]  80.15 15.75 270 bottom
R75  0  [GEN_R_0402]  79.02 15.75 270 bottom
R76  0  [GEN_R_0402]  77.94 15.88 270 top
R77  0  [GEN_R_0402]  76.83 15.87 270 top
R78  0  [GEN_R_0402]  77.9 15.75 270 bottom
R79  0  [GEN_R_0402]  76.77 15.75 270 bottom
R80  0  [GEN_R_0402]  75.73 15.87 270 top
R81  0  [GEN_R_0402]  74.64 15.87 270 top
R82  0  [GEN_R_0402]  75.67 15.75 270 bottom
R83  0  [GEN_R_0402]  74.62 15.75 270 bottom
R84  49.9  [GEN_R_0402]  61.62 23.83 270 bottom
R85  49.9  [GEN_R_0402]  61.65 24.71 90 top
R86  0  [GEN_R_0402]  62.09 15.51 0 bottom
R87  0.01  [GEN_R_0603]  50.72 13.35 180 bottom
R88  0  [GEN_R_0402]  90.49 68.73 0 top
R89  10K  [GEN_R_0402]  91.88 80.54 270 top
R90  10K  [GEN_R_0402]  95.2 75.67 0 top
R91  10K  [GEN_R_0402]  95.2 76.61 0 top
R92  1K  [GEN_R_0402]  95.2 79.5 180 top
R93  1K  [GEN_R_0402]  95.17 74.68 180 bottom
R94  1K  [GEN_R_0402]  95.2 74.73 180 top
R95  0.01  [GEN_R_0603]  77.75 28.9 0 bottom
R96A  909k  [GEN_R_0402]  33.24 23.04 90 top
R96B  909k  [GEN_R_0402]  33.24 43.54 90 top
R96C  909k  [GEN_R_0402]  33.27 64 90 top
R96D  909k  [GEN_R_0402]  33.26 84.49 90 top
R97A  0  [GEN_R_0402]  51.14 28.5 0 top
R97B  0  [GEN_R_0402]  51.14 49 0 top
R97C  0  [GEN_R_0402]  51.16 69.5 0 top
R97D  0  [GEN_R_0402]  51.17 89.95 0 top
R98A  90.9k  [GEN_R_0402]  41.36 29.7 180 top
R98B  90.9k  [GEN_R_0402]  41.36 50.2 180 top
R98C  90.9k  [GEN_R_0402]  41.4 70.66 180 top
R98D  90.9k  [GEN_R_0402]  41.39 91.14 180 top
R99A  90.9k  [GEN_R_0402]  41.33 28.78 0 top
R99B  90.9k  [GEN_R_0402]  41.33 49.28 0 top
R99C  90.9k  [GEN_R_0402]  41.36 69.74 0 top
R99D  90.9k  [GEN_R_0402]  41.35 90.23 0 top
R100A  2K  [GEN_R_0402]  35.75 26.83 270 top
R100B  2K  [GEN_R_0402]  35.76 47.22 270 top
R100C  2K  [GEN_R_0402]  35.92 67.86 270 top
R100D  2K  [GEN_R_0402]  35.9 88.35 270 top
R101  10K  [GEN_R_0402]  85.09 36.51 180 bottom
R102  10K  [GEN_R_0402]  85.1 35.4 180 bottom
R103  10K  [GEN_R_0402]  95.52 50.78 90 top
R104  0.1  [GEN_R_0402]  96.01 24.5 90 top
R105  100k  [GEN_R_0402]  94.84 87.41 180 top
R106  0  [GEN_R_0402]  96.3 69.56 180 top
R107  0  [GEN_R_0402]  96.3 70.64 180 top
R108  0  [GEN_R_0402]  96 52.42 180 top
R109  0  [GEN_R_0402]  96 53.49 180 top
R110  10K  [GEN_R_0402]  95.52 55.12 270 top
R111  1K  [GEN_R_0402]  95.17 73.73 180 bottom
R113  57.6k  [GEN_R_0402]  102.96 66.9 0 top
R114  10K  [GEN_R_0402]  99.63 65.91 0 top
R115  10K  [GEN_R_0402]  99.44 66.87 270 bottom
R116  0.01  [GEN_R_0603]  96 59.59 90 top
R117  0.1  [GEN_R_0402]  47.13 83.5 0 top
R118A  1K  [GEN_R_0402]  43.03 30.12 90 bottom
R118B  1K  [GEN_R_0402]  43.05 50.63 90 bottom
R118C  1K  [GEN_R_0402]  43.08 71.13 90 bottom
R118D  1K  [GEN_R_0402]  43.05 91.62 90 bottom
R119A  1K  [GEN_R_0402]  44.01 30.12 270 bottom
R119B  1K  [GEN_R_0402]  44.02 50.63 270 bottom
R119C  1K  [GEN_R_0402]  44.04 71.13 270 bottom
R119D  1K  [GEN_R_0402]  44.03 91.62 270 bottom
R120A  0  [GEN_R_0402]  39.28 33.08 180 top
R120B  0  [GEN_R_0402]  39.28 53.57 180 top
R120C  0  [GEN_R_0402]  39.32 74.03 180 top
R120D  0  [GEN_R_0402]  39.31 94.52 180 top
R121A  10K  [GEN_R_0402]  39.62 18.05 0 top
R121B  10K  [GEN_R_0402]  39.62 38.55 0 top
R121C  10K  [GEN_R_0402]  39.66 59.01 0 top
R121D  10K  [GEN_R_0402]  39.65 79.5 0 top
R122A  90.9k  [GEN_R_0402]  36.23 24.91 270 top
R122B  90.9k  [GEN_R_0402]  36.23 45.41 270 top
R122C  90.9k  [GEN_R_0402]  36.27 65.87 270 top
R122D  90.9k  [GEN_R_0402]  36.26 86.35 270 top
R123A  DNP  [GEN_R_0402]  39.59 18.05 180 bottom
R123B  DNP  [GEN_R_0402]  39.62 38.55 180 bottom
R123C  DNP  [GEN_R_0402]  39.62 59.05 180 bottom
R123D  DNP  [GEN_R_0402]  39.61 79.56 180 bottom
R124A  5K  [BOU_3MM_POT]  37.55 21.29 0 bottom
R124B  5K  [BOU_3MM_POT]  37.58 41.8 0 bottom
R124C  5K  [BOU_3MM_POT]  37.58 62.3 0 bottom
R124D  5K  [BOU_3MM_POT]  37.58 82.8 0 bottom
R125A  10K  [GEN_R_0402]  35.31 17.04 0 bottom
R125B  10K  [GEN_R_0402]  35.32 37.53 0 bottom
R125C  10K  [GEN_R_0402]  35.33 58.04 0 bottom
R125D  10K  [GEN_R_0402]  35.33 78.54 0 bottom
R126A  10K  [GEN_R_0402]  33.26 22.13 90 bottom
R126B  10K  [GEN_R_0402]  33.27 42.61 90 bottom
R126C  10K  [GEN_R_0402]  33.27 63.12 90 bottom
R126D  10K  [GEN_R_0402]  33.29 83.64 90 bottom
R127A  10K  [GEN_R_0402]  34.2 22.13 90 bottom
R127B  10K  [GEN_R_0402]  34.23 42.61 90 bottom
R127C  10K  [GEN_R_0402]  34.23 63.12 90 bottom
R127D  10K  [GEN_R_0402]  34.23 83.64 90 bottom
SHLD3A  2118728-2  [TE_2118728-2]  29.11 25.39 0 top
SHLD3B  2118728-2  [TE_2118728-2]  29.12 45.89 0 top
SHLD3C  2118728-2  [TE_2118728-2]  29.11 66.39 0 top
SHLD3D  2118728-2  [TE_2118728-2]  29.11 86.86 0 top
U1  SN74LVC1G17  [GEN_SC-70-5]  10.32 92.23 90 bottom
U2  IC BOOST TPS61023_U2  [TI_SOT563_DRL0006A]  92.62 90.43 180 top
U3  ADM7171ACPZ-5.0  [AD_DFN8_CP-8-21]  87.11 89.25 90 top
U4  LM27761  [TI_WSON8_DSG0008A]  82.04 90.18 0 top
U5  OP07CDR  [TI_SOIC8_D0008A]  76.28 90.43 90 top
U6  MCP4728  [MC_MSOP10_UN]  65.07 89.66 90 top
U7A  LMH6518  [TI_WQFN_RGH0016A]  47.37 28.97 270 top
U7B  LMH6518  [TI_WQFN_RGH0016A]  47.37 49.47 270 top
U7C  LMH6518  [TI_WQFN_RGH0016A]  47.41 69.93 270 top
U7D  LMH6518  [TI_WQFN_RGH0016A]  47.4 90.42 270 top
U8  OP07CDR  [TI_SOIC8_D0008A]  70.13 90.43 90 top
U9A  BUF802  [TI_VQFN_RGT0016C]  38.26 30.45 0 top
U9B  BUF802  [TI_VQFN_RGT0016C]  38.26 50.95 0 top
U9C  BUF802  [TI_VQFN_RGT0016C]  38.3 71.41 0 top
U9D  BUF802  [TI_VQFN_RGT0016C]  38.29 91.89 0 top
U10A  IC SWITCH SPST TS12A4516DBV_U10  [GEN_SOT23_5_950_2900X1600X1450]  35.51 20.38 270 top
U10B  IC SWITCH SPST TS12A4516DBV_U10  [GEN_SOT23_5_950_2900X1600X1450]  35.51 40.87 270 top
U10C  IC SWITCH SPST TS12A4516DBV_U10  [GEN_SOT23_5_950_2900X1600X1450]  35.55 61.33 270 top
U10D  IC SWITCH SPST TS12A4516DBV_U10  [GEN_SOT23_5_950_2900X1600X1450]  35.53 81.82 270 top
U11  IC BUCK TPS62A01_U11  [TI_SOT563_DRL0006A]  62.77 71.01 0 top
U12  HMCAD1511  [AD_QFN48_LP7]  76.49 72.8 0 top
U13  LD57100JR  [ST_FLIPCHIP6]  66.73 72.55 90 top
U14  IC SWITCH LOAD TPS22975_U14  [TI_WSON8_DSG0008A]  98.79 37.38 90 top
U15  ZL30260LDG1  [MC_QFN56_ZL30260]  89.48 74.48 90 top
U16  IC LDO TPS7A2025_U16  [GEN_SOT23_5_950_2900X1600X1450]  97.02 28.8 90 top
U17  MCP4432T-503E  [MC_TSSOP14]  60.29 90.43 270 top
U18A  OP07CDR  [TI_SOIC8_D0008A]  40.06 22.27 90 top
U18B  OP07CDR  [TI_SOIC8_D0008A]  40.06 42.77 90 top
U18C  OP07CDR  [TI_SOIC8_D0008A]  40.1 63.23 90 top
U18D  OP07CDR  [TI_SOIC8_D0008A]  40.08 83.71 90 top
U19  IC BUCK TPS562202_U19  [TI_SOT563_DRL0006A]  100.95 62.74 90 top
U20  IC LDO TPS7A2033_U20  [GEN_SOT23_5_950_2900X1600X1450]  48.49 80.75 270 top
Y1  10MHz  [ECS_TXO-3225]  98.36 73.18 180 top

## Library data of the parts
C1 = CAP 100nF 16V X7R 0402_C1: Tolerance: .TOL; User Part Number: .PARTNO
C2 = CAP 22uF 25V X5R 0805_C2: Tolerance: .TOL; User Part Number: .PARTNO
C3 = CAP 22uF 25V X5R 0805_C3: Tolerance: .TOL; User Part Number: .PARTNO
C4 = CAP 1nF 50V C0G 0402_C4: Tolerance: .TOL; User Part Number: .PARTNO
C5 = CAP 10uF 10V X5R 0603_C5: Tolerance: .TOL; User Part Number: .PARTNO
C6 = CAP 10uF 10V X5R 0603_C6: Tolerance: .TOL; User Part Number: .PARTNO
C7 = CAP 10uF 10V X5R 0603_C7: Tolerance: .TOL; User Part Number: .PARTNO
C8 = CAP 10uF 10V X5R 0603_C8: Tolerance: .TOL; User Part Number: .PARTNO
C9 = CAP 1uF 25V X5R 0402_C9: Tolerance: .TOL; User Part Number: .PARTNO
C10 = CAP 10nF 50V X7R 0402_C10: Tolerance: .TOL; User Part Number: .PARTNO
C11 = CAP 10uF 10V X5R 0603_C11: Tolerance: .TOL; User Part Number: .PARTNO
C12 = CAP 100nF 16V X7R 0402_C12: Tolerance: .TOL; User Part Number: .PARTNO
C13 = CAP 100nF 16V X7R 0402_C13: Tolerance: .TOL; User Part Number: .PARTNO
C14 = CAP 100nF 16V X7R 0402_C14: Tolerance: .TOL; User Part Number: .PARTNO
C15 = CAP 100nF 6.3V X5R 0201_C15: Tolerance: .TOL; User Part Number: .PARTNO
C16 = CAP 100nF 6.3V X5R 0201_C16: Tolerance: .TOL; User Part Number: .PARTNO
C17 = CAP 100nF 16V X7R 0402_C17: Tolerance: .TOL; User Part Number: .PARTNO
C18 = CAP 100nF 16V X7R 0402_C18: Tolerance: .TOL; User Part Number: .PARTNO
C19 = CAP 100nF 16V X7R 0402_C19: Tolerance: .TOL; User Part Number: .PARTNO
C20A C20B C20C C20D = CAP 2pF 250V C0G 0603_C20: Tolerance: .TOL; User Part Number: .PARTNO
C21A C21B C21C C21D = CAP 5.1pF 250V C0G 0603_C21: Tolerance: .TOL; User Part Number: .PARTNO
C22A C22B C22C C22D = CAP 2pF 250V C0G 0603_C22: Tolerance: .TOL; User Part Number: .PARTNO
C23A C23B C23C C23D = CAP 240pF 250V C0G 0805_C23: Tolerance: .TOL; User Part Number: .PARTNO
C26A C26B C26C C26D = CAP 22nF 100V X7R 0603_C26: Tolerance: .TOL; User Part Number: .PARTNO
C27A C27B C27C C27D = CAP 22nF 100V X7R 0603_C27: Tolerance: .TOL; User Part Number: .PARTNO
C28A C28B C28C C28D = CAP 100nF 16V X7R 0402_C28: Tolerance: .TOL; User Part Number: .PARTNO
C29A C29B C29C C29D = CAP 100pF 50V C0G 0402_C29: Tolerance: .TOL; User Part Number: .PARTNO
C30A C30B C30C C30D = CAP 100pF 50V C0G 0402_C30: Tolerance: .TOL; User Part Number: .PARTNO
C31A C31B C31C C31D = CAP 100nF 16V X7R 0402_C31: Tolerance: .TOL; User Part Number: .PARTNO
C32A C32B C32C C32D = CAP 1nF 50V C0G 0402_C32: Tolerance: .TOL; User Part Number: .PARTNO
C33A C33B C33C C33D = CAP 10nF 50V X7R 0402_C33: Tolerance: .TOL; User Part Number: .PARTNO
C34A C34B C34C C34D = CAP 100nF 16V X7R 0402_C34: Tolerance: .TOL; User Part Number: .PARTNO
C35A C35B C35C C35D = CAP 1uF 25V X5R 0402_C35: Tolerance: .TOL; User Part Number: .PARTNO
C36A C36B C36C C36D = CAP 100nF 16V X7R 0402_C36: Tolerance: .TOL; User Part Number: .PARTNO
C37A C37B C37C C37D = CAP 100nF 16V X7R 0402_C37: Tolerance: .TOL; User Part Number: .PARTNO
C38A C38B C38C C38D = CAP 2.2uF 10V X5R 0402_C38: Tolerance: .TOL; User Part Number: .PARTNO
C39A C39B C39C C39D = CAP 100nF 16V X7R 0402_C39: Tolerance: .TOL; User Part Number: .PARTNO
C40 = CAP 100nF 6.3V X5R 0201_C40: Tolerance: .TOL; User Part Number: .PARTNO
C41 = CAP 1uF 25V X5R 0402_C41: Tolerance: .TOL; User Part Number: .PARTNO
C42 = CAP 1uF 25V X5R 0402_C42: Tolerance: .TOL; User Part Number: .PARTNO
C43 = CAP 10nF 50V X7R 0402_C43: Tolerance: .TOL; User Part Number: .PARTNO
C44 = CAP 10nF 50V X7R 0402_C44: Tolerance: .TOL; User Part Number: .PARTNO
C45 = CAP 1nF 50V C0G 0402_C45: Tolerance: .TOL; User Part Number: .PARTNO
C46 = CAP 1nF 50V C0G 0402_C46: Tolerance: .TOL; User Part Number: .PARTNO
C47 = CAP 10nF 50V X7R 0402_C47: Tolerance: .TOL; User Part Number: .PARTNO
C48 = CAP 10nF 50V X7R 0402_C48: Tolerance: .TOL; User Part Number: .PARTNO
C49 = CAP 1uF 25V X5R 0402_C49: Tolerance: .TOL; User Part Number: .PARTNO
C50 = CAP 1uF 25V X5R 0402_C50: Tolerance: .TOL; User Part Number: .PARTNO
C51 = CAP 39pF 50V C0G 0402_C51: Tolerance: .TOL; User Part Number: .PARTNO
C52 = CAP 10uF 10V X5R 0603_C52: Tolerance: .TOL; User Part Number: .PARTNO
C53 = CAP 22uF 25V X5R 0805_C53: Tolerance: .TOL; User Part Number: .PARTNO
C54 = CAP 1uF 25V X5R 0402_C54: Tolerance: .TOL; User Part Number: .PARTNO
C55 = CAP 10nF 50V X7R 0402_C55: Tolerance: .TOL; User Part Number: .PARTNO
C56 = CAP 1nF 50V C0G 0402_C56: Tolerance: .TOL; User Part Number: .PARTNO
C57 = CAP 10nF 50V X7R 0402_C57: Tolerance: .TOL; User Part Number: .PARTNO
C58 = CAP 1uF 25V X5R 0402_C58: Tolerance: .TOL; User Part Number: .PARTNO
C59 = CAP 100nF 16V X7R 0402_C59: Tolerance: .TOL; User Part Number: .PARTNO
C60 = CAP 10uF 10V X5R 0603_C60: Tolerance: .TOL; User Part Number: .PARTNO
C61 = CAP 2.2uF 10V X5R 0402_C61: Tolerance: .TOL; User Part Number: .PARTNO
C62 = CAP 100nF 6.3V X5R 0201_C62: Tolerance: .TOL; User Part Number: .PARTNO
C63A C63B C63C C63D = CAP 100nF 16V X7R 0402_C63: Tolerance: .TOL; User Part Number: .PARTNO
C64A C64B C64C C64D = CAP 100nF 16V X7R 0402_C64: Tolerance: .TOL; User Part Number: .PARTNO
C65 = CAP 100nF 6.3V X5R 0201_C65: Tolerance: .TOL; User Part Number: .PARTNO
C66 = CAP 100nF 6.3V X5R 0201_C66: Tolerance: .TOL; User Part Number: .PARTNO
C67 = CAP 100nF 6.3V X5R 0201_C67: Tolerance: .TOL; User Part Number: .PARTNO
C68 = CAP 100nF 6.3V X5R 0201_C68: Tolerance: .TOL; User Part Number: .PARTNO
C69 = CAP 100nF 6.3V X5R 0201_C69: Tolerance: .TOL; User Part Number: .PARTNO
C70 = CAP 100nF 6.3V X5R 0201_C70: Tolerance: .TOL; User Part Number: .PARTNO
C71 = CAP 100nF 6.3V X5R 0201_C71: Tolerance: .TOL; User Part Number: .PARTNO
C72 = CAP 100nF 6.3V X5R 0201_C72: Tolerance: .TOL; User Part Number: .PARTNO
C73 = CAP 100nF 6.3V X5R 0201_C73: Tolerance: .TOL; User Part Number: .PARTNO
C74 = CAP 100nF 6.3V X5R 0201_C74: Tolerance: .TOL; User Part Number: .PARTNO
C75 = CAP 100nF 6.3V X5R 0201_C75: Tolerance: .TOL; User Part Number: .PARTNO
C76 = CAP 100nF 6.3V X5R 0201_C76: Tolerance: .TOL; User Part Number: .PARTNO
C77 = CAP 100nF 6.3V X5R 0201_C77: Tolerance: .TOL; User Part Number: .PARTNO
C78A C78B C78C C78D = CAP 100nF 16V X7R 0402_C78: Tolerance: .TOL; User Part Number: .PARTNO
C79 = CAP 100nF 6.3V X5R 0201_C79: Tolerance: .TOL; User Part Number: .PARTNO
C80 = CAP 100nF 6.3V X5R 0201_C80: Tolerance: .TOL; User Part Number: .PARTNO
C81 = CAP 100nF 6.3V X5R 0201_C81: Tolerance: .TOL; User Part Number: .PARTNO
C82 = CAP 1uF 25V X5R 0402_C82: Tolerance: .TOL; User Part Number: .PARTNO
C83 = CAP 1uF 25V X5R 0402_C83: Tolerance: .TOL; User Part Number: .PARTNO
C84 = CAP 1uF 25V X5R 0402_C84: Tolerance: .TOL; User Part Number: .PARTNO
C85 = CAP 1uF 25V X5R 0402_C85: Tolerance: .TOL; User Part Number: .PARTNO
C86 = CAP 1uF 25V X5R 0402_C86: Tolerance: .TOL; User Part Number: .PARTNO
C87 = CAP 1uF 25V X5R 0402_C87: Tolerance: .TOL; User Part Number: .PARTNO
C88 = CAP 1uF 25V X5R 0402_C88: Tolerance: .TOL; User Part Number: .PARTNO
C89 = CAP 1uF 25V X5R 0402_C89: Tolerance: .TOL; User Part Number: .PARTNO
C90 = CAP 1uF 25V X5R 0402_C90: Tolerance: .TOL; User Part Number: .PARTNO
C91 = CAP 22uF 25V X5R 0805_C91: Tolerance: .TOL; User Part Number: .PARTNO
C92 = CAP 1uF 25V X5R 0402_C92: Tolerance: .TOL; User Part Number: .PARTNO
C93 = CAP 1uF 25V X5R 0402_C93: Tolerance: .TOL; User Part Number: .PARTNO
C94 = CAP 1uF 25V X5R 0402_C94: Tolerance: .TOL; User Part Number: .PARTNO
C95 = CAP 1uF 25V X5R 0402_C95: Tolerance: .TOL; User Part Number: .PARTNO
C96 = RES 0 OHM 1/16W 0402_C96: Tolerance: .TOL; User Part Number: .PARTNO
C97 = RES 0 OHM 1/16W 0402_C97: Tolerance: .TOL; User Part Number: .PARTNO
C98 = CAP 100nF 16V X7R 0402_C98: Tolerance: .TOL; User Part Number: .PARTNO
C99 = CAP 100nF 16V X7R 0402_C99: Tolerance: .TOL; User Part Number: .PARTNO
C100 = CAP 100nF 16V X7R 0402_C100: Tolerance: .TOL; User Part Number: .PARTNO
C101A C101B C101C C101D = CAP 100nF 16V X7R 0402_C101: Tolerance: .TOL; User Part Number: .PARTNO
C102A C102B C102C C102D = CAP 2.2uF 10V X5R 0402_C102: Tolerance: .TOL; User Part Number: .PARTNO
C103 = RES 0 OHM 1/16W 0402_C103: Tolerance: .TOL; User Part Number: .PARTNO
C104 = RES 0 OHM 1/16W 0402_C104: Tolerance: .TOL; User Part Number: .PARTNO
C105 = CAP 1uF 25V X5R 0402_C105: Tolerance: .TOL; User Part Number: .PARTNO
C106 = CAP 1uF 25V X5R 0402_C106: Tolerance: .TOL; User Part Number: .PARTNO
C107 = CAP 100nF 16V X7R 0402_C107: Tolerance: .TOL; User Part Number: .PARTNO
C108A C108B C108C C108D = CAP 100nF 16V X7R 0402_C108: Tolerance: .TOL; User Part Number: .PARTNO
C109A C109B C109C C109D = CAP 100nF 16V X7R 0402_C109: Tolerance: .TOL; User Part Number: .PARTNO
C110A C110B C110C C110D = CAP 100nF 16V X7R 0402_C110: Tolerance: .TOL; User Part Number: .PARTNO
C111A C111B C111C C111D = CAP 2.2uF 10V X5R 0402_C111: Tolerance: .TOL; User Part Number: .PARTNO
C112 = CAP 1uF 25V X5R 0402_C112: Tolerance: .TOL; User Part Number: .PARTNO
C113 = CAP 1uF 25V X5R 0402_C113: Tolerance: .TOL; User Part Number: .PARTNO
C114 = CAP 1uF 25V X5R 0402_C114: Tolerance: .TOL; User Part Number: .PARTNO
C115 = CAP 1uF 25V X5R 0402_C115: Tolerance: .TOL; User Part Number: .PARTNO
C116 = CAP 1uF 25V X5R 0402_C116: Tolerance: .TOL; User Part Number: .PARTNO
C117 = CAP 100nF 16V X7R 0402_C117: Tolerance: .TOL; User Part Number: .PARTNO
C118 = CAP 39pF 50V C0G 0402_C118: Tolerance: .TOL; User Part Number: .PARTNO
C119 = CAP 22uF 25V X5R 0805_C119: Tolerance: .TOL; User Part Number: .PARTNO
C120 = CAP 22uF 25V X5R 0805_C120: Tolerance: .TOL; User Part Number: .PARTNO
C121 = CAP 100nF 16V X7R 0402_C121: Tolerance: .TOL; User Part Number: .PARTNO
C122 = CAP 22uF 25V X5R 0805_C122: Tolerance: .TOL; User Part Number: .PARTNO
C123 = CAP 22uF 25V X5R 0805_C123: Tolerance: .TOL; User Part Number: .PARTNO
C124A C124B C124C C124D = CAP 100nF 16V X7R 0402_C124: Tolerance: .TOL; User Part Number: .PARTNO
C125 = CAP 1uF 25V X5R 0402_C125: Tolerance: .TOL; User Part Number: .PARTNO
C126 = CAP 1uF 25V X5R 0402_C126: Tolerance: .TOL; User Part Number: .PARTNO
C127A C127B C127C C127D = CAP 100nF 16V X7R 0402_C127: Tolerance: .TOL; User Part Number: .PARTNO
C128A C128B C128C C128D = CAP 100nF 16V X7R 0402_C128: Tolerance: .TOL; User Part Number: .PARTNO
C129A C129B C129C C129D = CAP 100nF 16V X7R 0402_C129: Tolerance: .TOL; User Part Number: .PARTNO
C130A C130B C130C C130D = CAP 100nF 16V X7R 0402_C130: Tolerance: .TOL; User Part Number: .PARTNO
C131A C131B C131C C131D = CAP 100nF 16V X7R 0402_C131: Tolerance: .TOL; User Part Number: .PARTNO
C132A C132B C132C C132D = CAP 1uF 25V X5R 0402_C132: Tolerance: .TOL; User Part Number: .PARTNO
C133A C133B C133C C133D = CAP 2.2uF 10V X5R 0402_C133: Tolerance: .TOL; User Part Number: .PARTNO
C134 = CAP 100nF 16V X7R 0402_C134: Tolerance: .TOL; User Part Number: .PARTNO
D1 = LED GREEN 0603 LTST-S270K_D1: Tolerance: .TOL; User Part Number: .PARTNO
D2A D2B D2C D2D = DIODE 1N4148_D2: Tolerance: .TOL; User Part Number: .PARTNO
D3A D3B D3C D3D = DIODE 1N4148_D3: Tolerance: .TOL; User Part Number: .PARTNO
D4-D7 = TVS TPD1E1B04: Tolerance: .TOL; User Part Number: .PARTNO
FB1-FB3 FB5 FB7A FB7B FB7C FB7D FB8A FB8B FB8C FB8D FB9A FB9B FB9C FB9D FB10A FB10B FB10C FB10D = FERRITE BEAD 120 OHM 0402: Tolerance: .TOL; User Part Number: .PARTNO
FB4A FB4B FB4C FB4D = RES 0 OHM 1/16W 0402_FB4: Tolerance: .TOL; User Part Number: .PARTNO
FB6A FB6B FB6C FB6D = RES 0 OHM 1/16W 0402_FB6: Tolerance: .TOL; User Part Number: .PARTNO
J1 = CONN 2.54mm 2 Pin TH RA_J1: Tolerance: .TOL; User Part Number: .PARTNO
J2A J2B J2C J2D J7 J9 = BNC: Tolerance: .TOL; User Part Number: .PARTNO
J3A J3B J3C J3D J4A J4B J4C J4D J5 J6 = BNC_SMD: Tolerance: .TOL; User Part Number: .PARTNO
J8 = CONN 2.54mm 6 Pin TH RA_J8: Tolerance: .TOL; User Part Number: .PARTNO
J10 = CONN M.2 Key M FEMALE_J10: Tolerance: .TOL; User Part Number: .PARTNO
J11 = CONN 1.27mm 2x5 Pin TH RA_J11: Tolerance: .TOL; User Part Number: .PARTNO
J12 = CONN JST PH 2 Pin TH_J12: Tolerance: .TOL; User Part Number: .PARTNO
J13 = CONN JST PH 2 Pin TH_J13: Tolerance: .TOL; User Part Number: .PARTNO
JM1 = CONN LSHM-150-02.5-L-DV-A-S_JM1: Tolerance: .TOL; User Part Number: .PARTNO
JM2 = CONN LSHM-150-02.5-L-DV-A-S_JM2: Tolerance: .TOL; User Part Number: .PARTNO
JM3 = CONN LSHM-130-02.5-L-DV-A-S_JM3: Tolerance: .TOL; User Part Number: .PARTNO
K1A K1B K1C K1D = RELAY DPDT-NO FTR-B3SA4.5Z_K1: Tolerance: .TOL; User Part Number: .PARTNO
K2A K2B K2C K2D = RELAY DPDT-NO FTR-B3SA4.5Z_K2: Tolerance: .TOL; User Part Number: .PARTNO
L1 = IND 1uH 3.1A 45 MOHM 1210_L1: Tolerance: .TOL; User Part Number: .PARTNO
L2 = IND 1uH 3.1A 45 MOHM 1210_L2: Tolerance: .TOL; User Part Number: .PARTNO
L3 = IND 4.7uH 2.6A 35 MOHM SMD_L3: Tolerance: .TOL; User Part Number: .PARTNO
MH1 = MH M3_MH1: Tolerance: .TOL; User Part Number: .PARTNO
MH2 = MH M3_MH2: Tolerance: .TOL; User Part Number: .PARTNO
MH3 = MH M3_MH3: Tolerance: .TOL; User Part Number: .PARTNO
MH4 = MH M3_MH4: Tolerance: .TOL; User Part Number: .PARTNO
P1 = PCIeX4-GF-2D-1000-1K-O64_P1: Tolerance: .TOL; User Part Number: .PARTNO
Q1 = NMOS DMN62D0UW_Q1: Tolerance: .TOL; User Part Number: .PARTNO
Q2 = NMOS DMN62D0UW_Q2: Tolerance: .TOL; User Part Number: .PARTNO
Q3A Q3B Q3C Q3D = NMOS DMN62D0UW_Q3: Tolerance: .TOL; User Part Number: .PARTNO
Q4A Q4B Q4C Q4D = NMOS DMN62D0UW_Q4: Tolerance: .TOL; User Part Number: .PARTNO
Q5A Q5B Q5C Q5D = NMOS DMN62D0UW_Q5: Tolerance: .TOL; User Part Number: .PARTNO
R1 = RES 0 OHM 1/16W 0402_R1: Tolerance: .TOL; User Part Number: .PARTNO
R2 = RES 10K OHM 1% 1/10W 0402_R2: Tolerance: .TOL; User Part Number: .PARTNO
R3 = RES 0.01 OHM 1% 1/4W 0603_R3: Tolerance: .TOL; User Part Number: .PARTNO
R6 = RES 10K OHM 1% 1/10W 0402_R6: Tolerance: .TOL; User Part Number: .PARTNO
R7 = RES 0.01 OHM 1% 1/4W 0603_R7: Tolerance: .TOL; User Part Number: .PARTNO
R8 = RES 0.1 OHM 1% 1/6W 0402_R8: Tolerance: .TOL; User Part Number: .PARTNO
R9 = RES 0.1 OHM 1% 1/6W 0402_R9: Tolerance: .TOL; User Part Number: .PARTNO
R10 = RES 680K OHM 1% 1/16W 0402_R10: Tolerance: .TOL; User Part Number: .PARTNO
R11 = RES 300K OHM 1% 1/10W 0402_R11: Tolerance: .TOL; User Part Number: .PARTNO
R12 = RES 90.9K OHM 1% 1/16W 0402_R12: Tolerance: .TOL; User Part Number: .PARTNO
R13 = RES 100K OHM 1% 1/10W 0402_R13: Tolerance: .TOL; User Part Number: .PARTNO
R14 = RES 10K OHM 1% 1/10W 0402_R14: Tolerance: .TOL; User Part Number: .PARTNO
R15 = RES 2K OHM 1% 1/16W 0402_R15: Tolerance: .TOL; User Part Number: .PARTNO
R16 = RES 10K OHM 1% 1/10W 0402_R16: Tolerance: .TOL; User Part Number: .PARTNO
R17 = RES 2K OHM 1% 1/16W 0402_R17: Tolerance: .TOL; User Part Number: .PARTNO
R18 = RES 2K OHM 1% 1/16W 0402_R18: Tolerance: .TOL; User Part Number: .PARTNO
R19 = RES 2K OHM 1% 1/16W 0402_R19: Tolerance: .TOL; User Part Number: .PARTNO
R20 = RES 10K OHM 1% 1/10W 0402_R20: Tolerance: .TOL; User Part Number: .PARTNO
R21 = RES 10K OHM 1% 1/10W 0402_R21: Tolerance: .TOL; User Part Number: .PARTNO
R22 = RES 10K OHM 1% 1/10W 0402_R22: Tolerance: .TOL; User Part Number: .PARTNO
R23 = RES 10K OHM 1% 1/10W 0402_R23: Tolerance: .TOL; User Part Number: .PARTNO
R24 = RES 10K OHM 1% 1/10W 0402_R24: Tolerance: .TOL; User Part Number: .PARTNO
R25 = RES 10K OHM 1% 1/10W 0402_R25: Tolerance: .TOL; User Part Number: .PARTNO
R26 = RES 1K OHM 1% 1/10W 0402_R26: Tolerance: .TOL; User Part Number: .PARTNO
R27 = RES 1K OHM 1% 1/10W 0402_R27: Tolerance: .TOL; User Part Number: .PARTNO
R28 = RES 1K OHM 1% 1/10W 0402_R28: Tolerance: .TOL; User Part Number: .PARTNO
R29A R29B R29C R29D = RES 30 OHM 1% 1/3W 0603_R29: Tolerance: .TOL; User Part Number: .PARTNO
R30A R30B R30C R30D = RES 10 OHM 1% 1/3W 0603_R30: Tolerance: .TOL; User Part Number: .PARTNO
R31A R31B R31C R31D = RES 10 OHM 1% 1/3W 0603_R31: Tolerance: .TOL; User Part Number: .PARTNO
R32A R32B R32C R32D = RES 300K OHM 1% 1/10W 0402_R32: Tolerance: .TOL; User Part Number: .PARTNO
R33A R33B R33C R33D = RES 680K OHM 1% 1/16W 0402_R33: Tolerance: .TOL; User Part Number: .PARTNO
R35A R35B R35C R35D = RES 20K OHM 1% 1/16W 0402_R35: Tolerance: .TOL; User Part Number: .PARTNO
R36 = RES 0.01 OHM 1% 1/4W 0603_R36: Tolerance: .TOL; User Part Number: .PARTNO
R37 = RES 220K OHM 1% 1/16W 0402_R37: Tolerance: .TOL; User Part Number: .PARTNO
R38 = RES 10K OHM 1% 1/10W 0402_R38: Tolerance: .TOL; User Part Number: .PARTNO
R39 = RES 100K OHM 1% 1/10W 0402_R39: Tolerance: .TOL; User Part Number: .PARTNO
R41A R41B R41C R41D = RES 10 OHM 1% 1/3W 0603_R41: Tolerance: .TOL; User Part Number: .PARTNO
R42 = RES 10K OHM 1% 1/10W 0402_R42: Tolerance: .TOL; User Part Number: .PARTNO
R43A R43B R43C R43D = RES 10 OHM 1% 1/3W 0603_R43: Tolerance: .TOL; User Part Number: .PARTNO
R44 = RES 10K OHM 1% 1/10W 0402_R44: Tolerance: .TOL; User Part Number: .PARTNO
R46 = RES 10K OHM 1% 1/10W 0402_R46: Tolerance: .TOL; User Part Number: .PARTNO
R47A R47B R47C R47D = RES 10K OHM 1% 1/10W 0402_R47: Tolerance: .TOL; User Part Number: .PARTNO
R48A R48B R48C R48D = RES 10K OHM 1% 1/10W 0402_R48: Tolerance: .TOL; User Part Number: .PARTNO
R49A R49B R49C R49D = RES 10K OHM 1% 1/10W 0402_R49: Tolerance: .TOL; User Part Number: .PARTNO
R50A R50B R50C R50D = RES 10K OHM 1% 1/10W 0402_R50: Tolerance: .TOL; User Part Number: .PARTNO
R51A R51B R51C R51D = RES 10K OHM 1% 1/10W 0402_R51: Tolerance: .TOL; User Part Number: .PARTNO
R52A R52B R52C R52D = RES 0 OHM 1/16W 0402_R52: Tolerance: .TOL; User Part Number: .PARTNO
R53A R53B R53C R53D = RES 30 OHM 1% 1/3W 0603_R53: Tolerance: .TOL; User Part Number: .PARTNO
R54A R54B R54C R54D = RES 30 OHM 1% 1/3W 0603_R54: Tolerance: .TOL; User Part Number: .PARTNO
R55A R55B R55C R55D = RES 100K OHM 1% 1/10W 0402_R55: Tolerance: .TOL; User Part Number: .PARTNO
R56A R56B R56C R56D = RES 0 OHM 1/16W 0402_R56: Tolerance: .TOL; User Part Number: .PARTNO
R57 = RES 100 OHM 1% 1/10W 0402_R57: Tolerance: .TOL; User Part Number: .PARTNO
R58 = RES 0.01 OHM 1% 1/4W 0603_R58: Tolerance: .TOL; User Part Number: .PARTNO
R59 = RES 261K OHM 1% 1/16W 0402_R59: Tolerance: .TOL; User Part Number: .PARTNO
R60 = RES 100 OHM 1% 1/10W 0402_R60: Tolerance: .TOL; User Part Number: .PARTNO
R61 = RES 100K OHM 1% 1/10W 0402_R61: Tolerance: .TOL; User Part Number: .PARTNO
R62 = RES 100 OHM 1% 1/10W 0402_R62: Tolerance: .TOL; User Part Number: .PARTNO
R63 = RES 100 OHM 1% 1/10W 0402_R63: Tolerance: .TOL; User Part Number: .PARTNO
R64 = RES 100 OHM 1% 1/10W 0402_R64: Tolerance: .TOL; User Part Number: .PARTNO
R65A R65B R65C R65D = RES 909K OHM 1% 1/16W 0402_R65: Tolerance: .TOL; User Part Number: .PARTNO
R66 = RES 10K OHM 1% 1/10W 0402_R66: Tolerance: .TOL; User Part Number: .PARTNO
R67 = RES 1K OHM 1% 1/10W 0402_R67: Tolerance: .TOL; User Part Number: .PARTNO
R68 = RES 0 OHM 1% 1/20W 0201_R68: Tolerance: .TOL; User Part Number: .PARTNO
R69 = RES 0 OHM 1% 1/20W 0201_R69: Tolerance: .TOL; User Part Number: .PARTNO
R70 = RES 0 OHM 1% 1/20W 0201_R70: Tolerance: .TOL; User Part Number: .PARTNO
R71 = RES 0 OHM 1% 1/20W 0201_R71: Tolerance: .TOL; User Part Number: .PARTNO
R72 = RES 0 OHM 1% 1/20W 0201_R72: Tolerance: .TOL; User Part Number: .PARTNO
R73 = RES 0 OHM 1% 1/20W 0201_R73: Tolerance: .TOL; User Part Number: .PARTNO
R74 = RES 0 OHM 1% 1/20W 0201_R74: Tolerance: .TOL; User Part Number: .PARTNO
R75 = RES 0 OHM 1% 1/20W 0201_R75: Tolerance: .TOL; User Part Number: .PARTNO
R76 = RES 0 OHM 1% 1/20W 0201_R76: Tolerance: .TOL; User Part Number: .PARTNO
R77 = RES 0 OHM 1% 1/20W 0201_R77: Tolerance: .TOL; User Part Number: .PARTNO
R78 = RES 0 OHM 1% 1/20W 0201_R78: Tolerance: .TOL; User Part Number: .PARTNO
R79 = RES 0 OHM 1% 1/20W 0201_R79: Tolerance: .TOL; User Part Number: .PARTNO
R80 = RES 0 OHM 1% 1/20W 0201_R80: Tolerance: .TOL; User Part Number: .PARTNO
R81 = RES 0 OHM 1% 1/20W 0201_R81: Tolerance: .TOL; User Part Number: .PARTNO
R82 = RES 0 OHM 1% 1/20W 0201_R82: Tolerance: .TOL; User Part Number: .PARTNO
R83 = RES 0 OHM 1% 1/20W 0201_R83: Tolerance: .TOL; User Part Number: .PARTNO
R84 = RES 49.9 OHM 1% 1/10W 0402_R84: Tolerance: .TOL; User Part Number: .PARTNO
R85 = RES 49.9 OHM 1% 1/10W 0402_R85: Tolerance: .TOL; User Part Number: .PARTNO
R86 = RES 0 OHM 1/16W 0402_R86: Tolerance: .TOL; User Part Number: .PARTNO
R87 = RES 0.01 OHM 1% 1/4W 0603_R87: Tolerance: .TOL; User Part Number: .PARTNO
R88 = RES 0 OHM 1/16W 0402_R88: Tolerance: .TOL; User Part Number: .PARTNO
R89 = RES 10K OHM 1% 1/10W 0402_R89: Tolerance: .TOL; User Part Number: .PARTNO
R90 = RES 10K OHM 1% 1/10W 0402_R90: Tolerance: .TOL; User Part Number: .PARTNO
R91 = RES 10K OHM 1% 1/10W 0402_R91: Tolerance: .TOL; User Part Number: .PARTNO
R92 = RES 1K OHM 1% 1/10W 0402_R92: Tolerance: .TOL; User Part Number: .PARTNO
R93 = RES 1K OHM 1% 1/10W 0402_R93: Tolerance: .TOL; User Part Number: .PARTNO
R94 = RES 1K OHM 1% 1/10W 0402_R94: Tolerance: .TOL; User Part Number: .PARTNO
R95 = RES 0.01 OHM 1% 1/4W 0603_R95: Tolerance: .TOL; User Part Number: .PARTNO
R96A R96B R96C R96D = RES 909K OHM 1% 1/16W 0402_R96: Tolerance: .TOL; User Part Number: .PARTNO
